# EAGLE board ai_breakout_ft2323RL_panel (EAGLE 6.5.0)
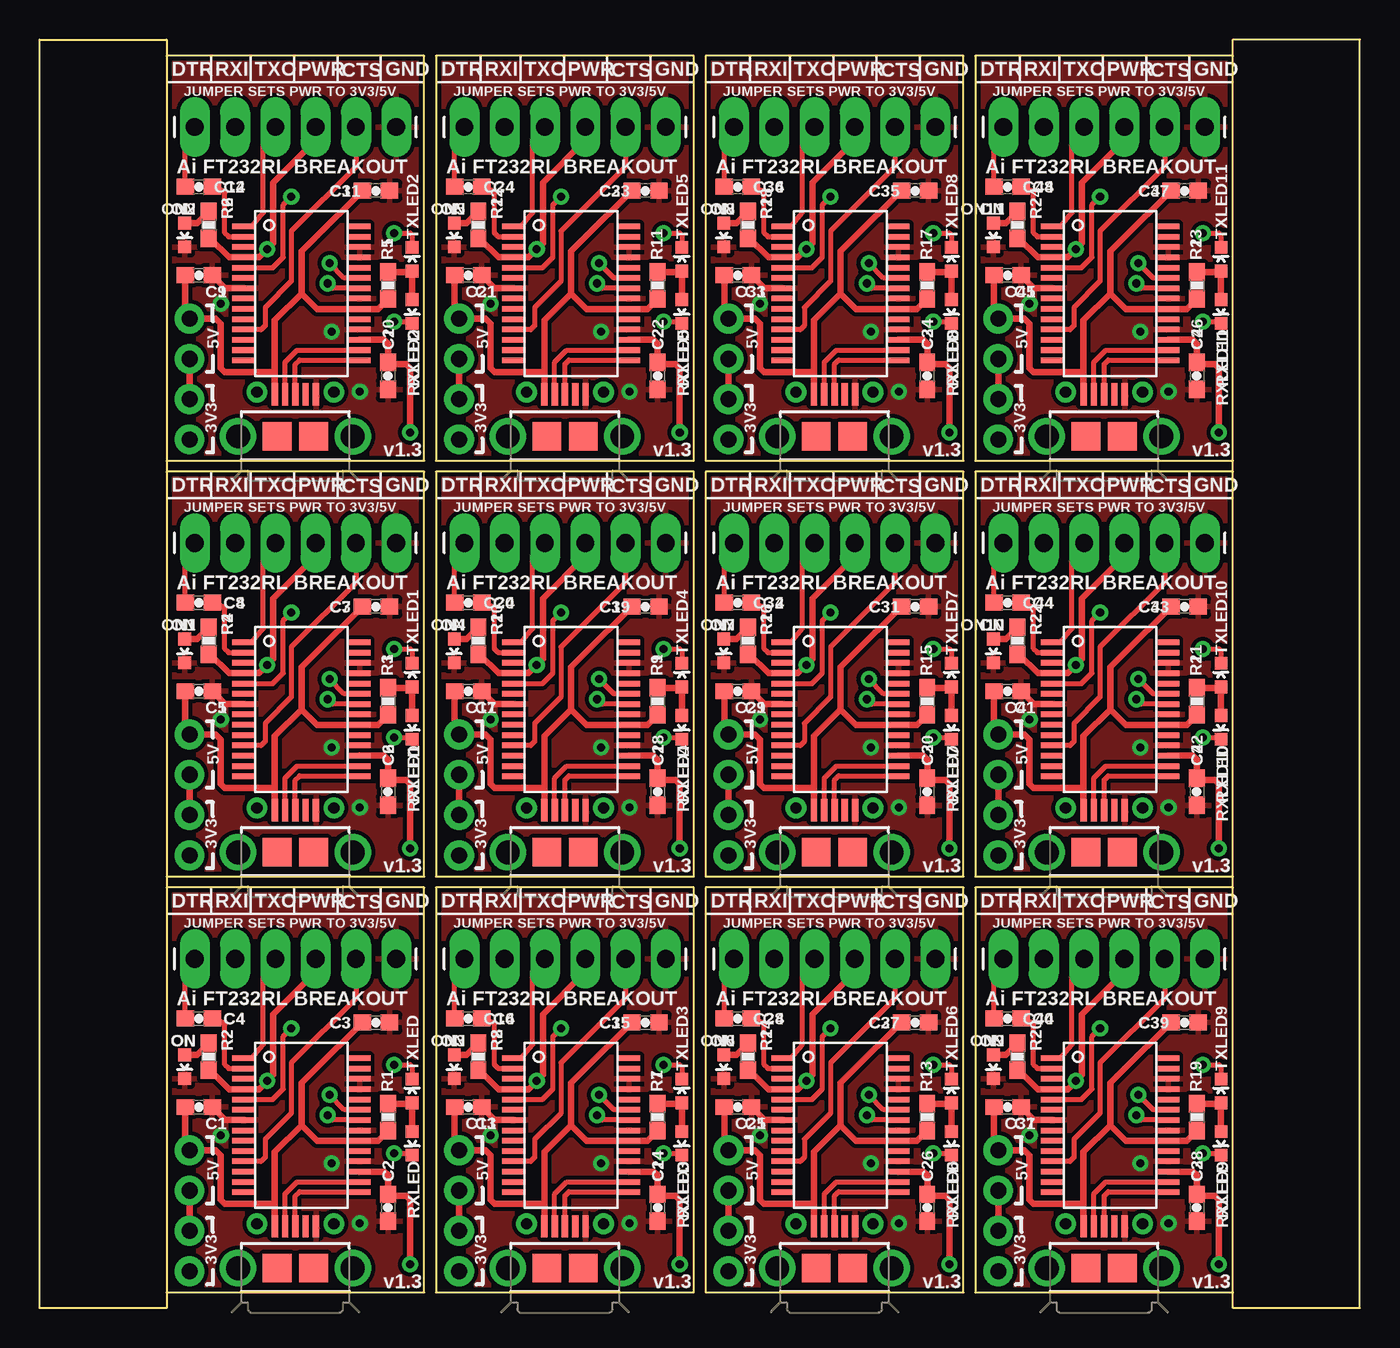
[diagram p0: board, top side]
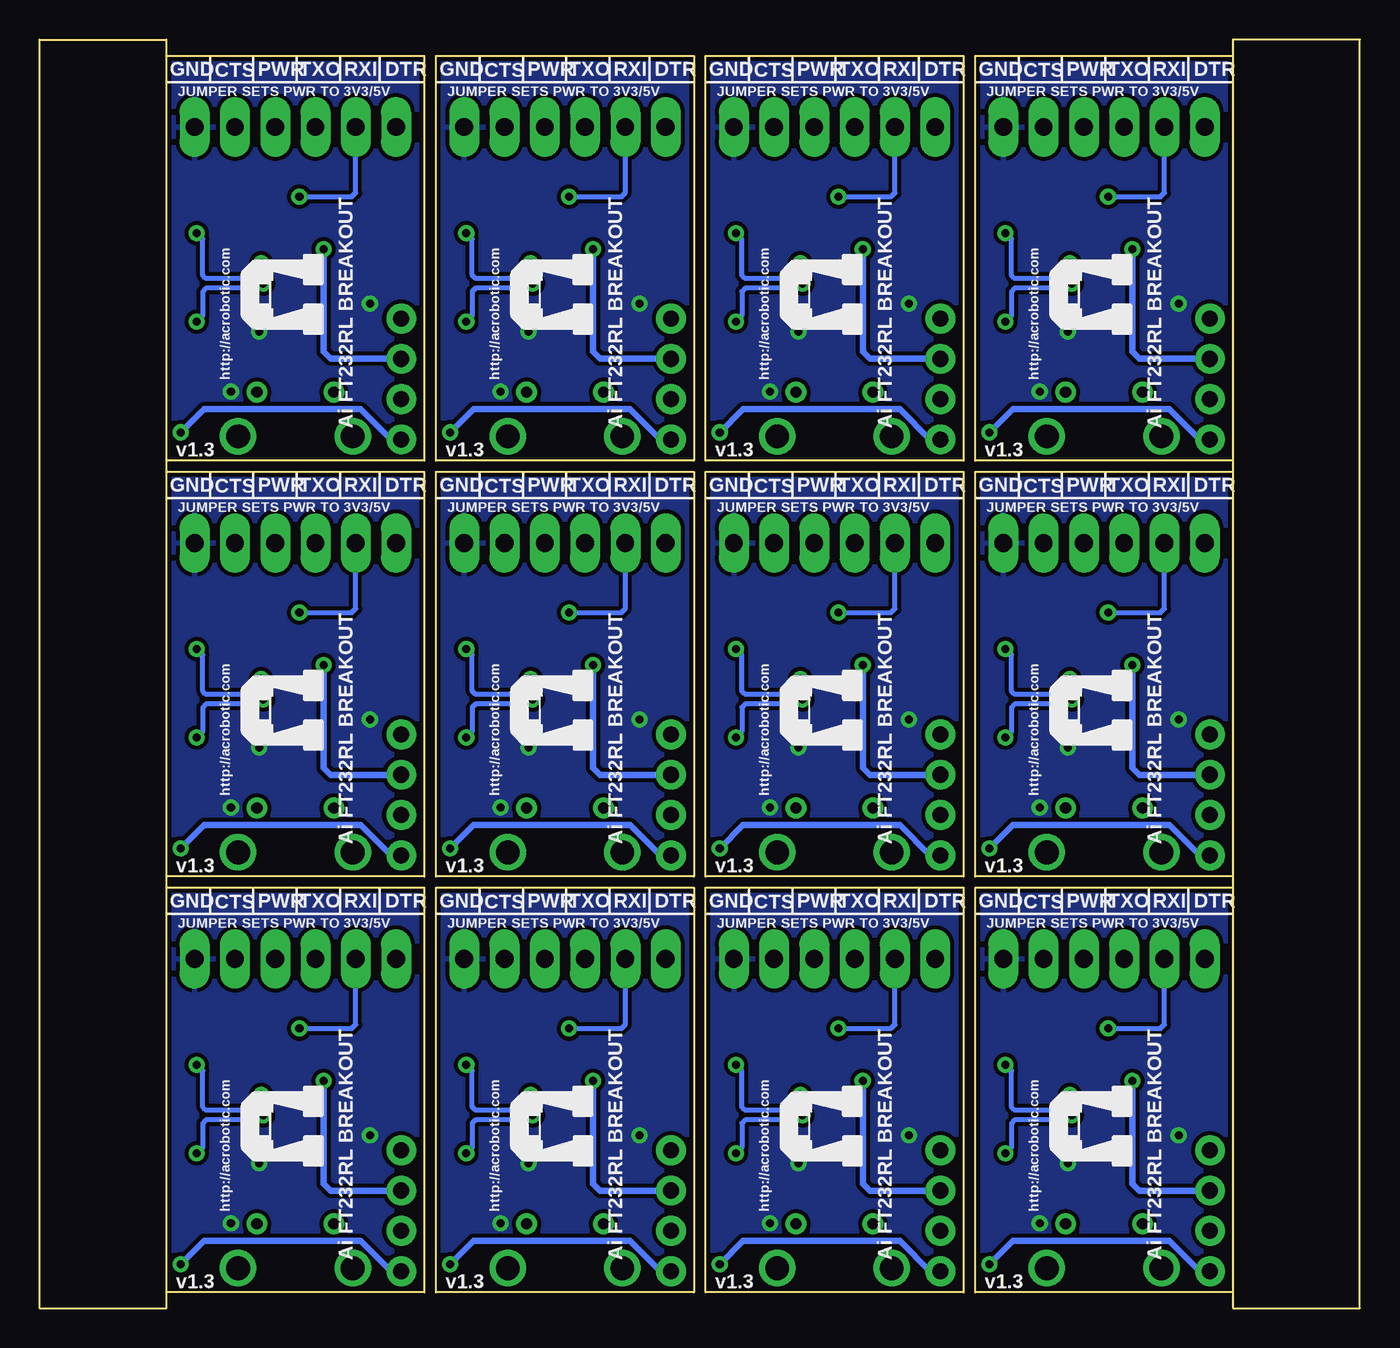
[diagram p1: board, bottom side, seen from below]

Size 83.26 x 80 mm. Coordinates in mm from the lower left corner, seen from the top.
Outline: 8,26.53 8,1 24.26,1 24.26,26.53 8,26.53
Outline: 0,0 0,80 8,80 8,0 0,0
Outline: 83.26,80 75.26,80 75.26,0 83.26,0 83.26,80
Outline: 8,52.75 8,27.23 24.26,27.23 24.26,52.75 8,52.75
Outline: 8,78.98 8,53.45 24.26,53.45 24.26,78.98 8,78.98
Outline: 25,26.53 25,1 41.26,1 41.26,26.53 25,26.53
Outline: 25,52.75 25,27.23 41.26,27.23 41.26,52.75 25,52.75
Outline: 25,78.98 25,53.45 41.26,53.45 41.26,78.98 25,78.98
Outline: 42,26.53 42,1 58.26,1 58.26,26.53 42,26.53
Outline: 42,52.75 42,27.23 58.26,27.23 58.26,52.75 42,52.75
Outline: 42,78.98 42,53.45 58.26,53.45 58.26,78.98 42,78.98
Outline: 59,26.53 59,1 75.26,1 75.26,26.53 59,26.53
Outline: 59,52.75 59,27.23 75.26,27.23 75.26,52.75 59,52.75
Outline: 59,78.98 59,53.45 75.26,53.45 75.26,78.98 59,78.98
Copper layers (1*16): Top 0.035mm / dielectric 1.5mm / Bottom 0.035mm
Design rules "ai_2layer": minimum track width 7mil, minimum drill 15mil, track to track 8mil, track to pad 8mil, pad to pad 8mil, via to via 8mil, smd to smd 8mil, copper to edge 8mil, drill to drill 8mil, minimum pad ring 12mil, minimum via ring 10mil, stop-mask expansion 4mil, vias tented up to drill 20mil, thermal gap 10mil
Net classes: 0 default: width 0.254 mm; 1 power: width 0.356 mm

## Footprints (pad centres in the part's own frame; a part is rotated, then mirrored left to right if it is on the bottom)
CAP-0603 = smd 1.1 x 1: 1 -0.85,0; 2 0.85,0
SSOP28-LD = smd 0.348 x 1.397: 1 -4.225,-3.656; 2 -3.575,-3.656; 3 -2.925,-3.656; 4 -2.275,-3.656; 5 -1.625,-3.656; 6 -0.975,-3.656; 7 -0.325,-3.656; 8 0.325,-3.656; 9 0.975,-3.656; 10 1.625,-3.656; 11 2.275,-3.656; 12 2.925,-3.656; 13 3.575,-3.656; 14 4.225,-3.656; 15 4.225,3.656; 16 3.575,3.656; 17 2.925,3.656; 18 2.275,3.656; 19 1.625,3.656; 20 0.975,3.656; 21 0.325,3.656; 22 -0.325,3.656; 23 -0.975,3.656; 24 -1.625,3.656; 25 -2.275,3.656; 26 -2.925,3.656; 27 -3.575,3.656; 28 -4.225,3.656
1X06-LONG = drill 1.118 pad 1.88 long: 1 -6.35,0; 2 -3.81,0; 3 -1.27,0; 4 1.27,0; 5 3.81,0; 6 6.35,0
1X04-NOSILK = drill 1.016 pad 1.88: 1 -3.81,0; 2 -1.27,0; 3 1.27,0; 4 3.81,0
LED-0603 = smd 0.8 x 0.8: A 0,-0.75; C 0,0.75
RES-0603 = smd 1.1 x 1: 1 -0.85,0; 2 0.85,0
USB-MICROB-TH = smd 0.4 x 1.4: D+ 0,2.65; D- -0.65,2.65; GND 1.3,2.65; ID 0.65,2.65; VBUS -1.3,2.65 | smd 1.8 x 1.8: M5 -1.15,0; M6 1.15,0 | drill 0.7: MT1 -2.425,2.8; MT2 2.425,2.8 | drill 1.5 pad 2.3: MT3 -3.61,0; MT4 3.61,0

## Placement (x,y rotation side)
C1  0.1uF  [CAP-0603]  10.03,12.68 0 top
C2  0.1uF  [CAP-0603]  21.97,6.33 270 top
C3  10uF  [CAP-0603]  21.21,18.02 0 top
C4  1uF  [CAP-0603]  10.03,18.27 180 top
C5  0.1uF  [CAP-0603]  10.03,38.91 0 top
C6  0.1uF  [CAP-0603]  21.97,32.56 270 top
C7  10uF  [CAP-0603]  21.21,44.24 0 top
C8  1uF  [CAP-0603]  10.03,44.5 180 top
C9  0.1uF  [CAP-0603]  10.03,65.14 0 top
C10  0.1uF  [CAP-0603]  21.97,58.79 270 top
C11  10uF  [CAP-0603]  21.21,70.47 0 top
C12  1uF  [CAP-0603]  10.03,70.73 180 top
C13  0.1uF  [CAP-0603]  27.03,12.68 0 top
C14  0.1uF  [CAP-0603]  38.97,6.33 270 top
C15  10uF  [CAP-0603]  38.21,18.02 0 top
C16  1uF  [CAP-0603]  27.03,18.27 180 top
C17  0.1uF  [CAP-0603]  27.03,38.91 0 top
C18  0.1uF  [CAP-0603]  38.97,32.56 270 top
C19  10uF  [CAP-0603]  38.21,44.24 0 top
C20  1uF  [CAP-0603]  27.03,44.5 180 top
C21  0.1uF  [CAP-0603]  27.03,65.14 0 top
C22  0.1uF  [CAP-0603]  38.97,58.79 270 top
C23  10uF  [CAP-0603]  38.21,70.47 0 top
C24  1uF  [CAP-0603]  27.03,70.73 180 top
C25  0.1uF  [CAP-0603]  44.03,12.68 0 top
C26  0.1uF  [CAP-0603]  55.97,6.33 270 top
C27  10uF  [CAP-0603]  55.21,18.02 0 top
C28  1uF  [CAP-0603]  44.03,18.27 180 top
C29  0.1uF  [CAP-0603]  44.03,38.91 0 top
C30  0.1uF  [CAP-0603]  55.97,32.56 270 top
C31  10uF  [CAP-0603]  55.21,44.24 0 top
C32  1uF  [CAP-0603]  44.03,44.5 180 top
C33  0.1uF  [CAP-0603]  44.03,65.14 0 top
C34  0.1uF  [CAP-0603]  55.97,58.79 270 top
C35  10uF  [CAP-0603]  55.21,70.47 0 top
C36  1uF  [CAP-0603]  44.03,70.73 180 top
C37  0.1uF  [CAP-0603]  61.03,12.68 0 top
C38  0.1uF  [CAP-0603]  72.97,6.33 270 top
C39  10uF  [CAP-0603]  72.21,18.02 0 top
C40  1uF  [CAP-0603]  61.03,18.27 180 top
C41  0.1uF  [CAP-0603]  61.03,38.91 0 top
C42  0.1uF  [CAP-0603]  72.97,32.56 270 top
C43  10uF  [CAP-0603]  72.21,44.24 0 top
C44  1uF  [CAP-0603]  61.03,44.5 180 top
C45  0.1uF  [CAP-0603]  61.03,65.14 0 top
C46  0.1uF  [CAP-0603]  72.97,58.79 270 top
C47  10uF  [CAP-0603]  72.21,70.47 0 top
C48  1uF  [CAP-0603]  61.03,70.73 180 top
IC1  FT2332RL  [SSOP28-LD]  16.51,11.54 270 top
IC2  FT2332RL  [SSOP28-LD]  16.51,37.77 270 top
IC3  FT2332RL  [SSOP28-LD]  16.51,63.99 270 top
IC4  FT2332RL  [SSOP28-LD]  33.51,11.54 270 top
IC5  FT2332RL  [SSOP28-LD]  33.51,37.77 270 top
IC6  FT2332RL  [SSOP28-LD]  33.51,63.99 270 top
IC7  FT2332RL  [SSOP28-LD]  50.51,11.54 270 top
IC8  FT2332RL  [SSOP28-LD]  50.51,37.77 270 top
IC9  FT2332RL  [SSOP28-LD]  50.51,63.99 270 top
IC10  FT2332RL  [SSOP28-LD]  67.51,11.54 270 top
IC11  FT2332RL  [SSOP28-LD]  67.51,37.77 270 top
IC12  FT2332RL  [SSOP28-LD]  67.51,63.99 270 top
J1  1X06LONG  [1X06-LONG]  16.13,22.03 180 top
J2  1X06LONG  [1X06-LONG]  16.13,48.26 180 top
J3  1X06LONG  [1X06-LONG]  16.13,74.49 180 top
J4  1X06LONG  [1X06-LONG]  33.13,22.03 180 top
J5  1X06LONG  [1X06-LONG]  33.13,48.26 180 top
J6  1X06LONG  [1X06-LONG]  33.13,74.49 180 top
J7  1X06LONG  [1X06-LONG]  50.13,22.03 180 top
J8  1X06LONG  [1X06-LONG]  50.13,48.26 180 top
J9  1X06LONG  [1X06-LONG]  50.13,74.49 180 top
J10  1X06LONG  [1X06-LONG]  67.13,22.03 180 top
J11  1X06LONG  [1X06-LONG]  67.13,48.26 180 top
J12  1X06LONG  [1X06-LONG]  67.13,74.49 180 top
JP1  1X04NOSILK  [1X04-NOSILK]  9.45,6.15 270 top
JP2  1X04NOSILK  [1X04-NOSILK]  9.45,32.37 270 top
JP3  1X04NOSILK  [1X04-NOSILK]  9.45,58.6 270 top
JP4  1X04NOSILK  [1X04-NOSILK]  26.45,6.15 270 top
JP5  1X04NOSILK  [1X04-NOSILK]  26.45,32.37 270 top
JP6  1X04NOSILK  [1X04-NOSILK]  26.45,58.6 270 top
JP7  1X04NOSILK  [1X04-NOSILK]  43.45,6.15 270 top
JP8  1X04NOSILK  [1X04-NOSILK]  43.45,32.37 270 top
JP9  1X04NOSILK  [1X04-NOSILK]  43.45,58.6 270 top
JP10  1X04NOSILK  [1X04-NOSILK]  60.45,6.15 270 top
JP11  1X04NOSILK  [1X04-NOSILK]  60.45,32.37 270 top
JP12  1X04NOSILK  [1X04-NOSILK]  60.45,58.6 270 top
ON  BLUE  [LED-0603]  9.14,15.22 180 top
ON1  BLUE  [LED-0603]  9.14,41.45 180 top
ON2  BLUE  [LED-0603]  9.14,67.68 180 top
ON3  BLUE  [LED-0603]  26.14,15.22 180 top
ON4  BLUE  [LED-0603]  26.14,41.45 180 top
ON5  BLUE  [LED-0603]  26.14,67.68 180 top
ON6  BLUE  [LED-0603]  43.14,15.22 180 top
ON7  BLUE  [LED-0603]  43.14,41.45 180 top
ON8  BLUE  [LED-0603]  43.14,67.68 180 top
ON9  BLUE  [LED-0603]  60.14,15.22 180 top
ON10  BLUE  [LED-0603]  60.14,41.45 180 top
ON11  BLUE  [LED-0603]  60.14,67.68 180 top
R1  300  [RES-0603]  21.97,12.05 270 top
R2  1K  [RES-0603]  10.67,15.86 90 top
R3  300  [RES-0603]  21.97,38.28 270 top
R4  1K  [RES-0603]  10.67,42.09 90 top
R5  300  [RES-0603]  21.97,64.5 270 top
R6  1K  [RES-0603]  10.67,68.31 90 top
R7  300  [RES-0603]  38.97,12.05 270 top
R8  1K  [RES-0603]  27.67,15.86 90 top
R9  300  [RES-0603]  38.97,38.28 270 top
R10  1K  [RES-0603]  27.67,42.09 90 top
R11  300  [RES-0603]  38.97,64.5 270 top
R12  1K  [RES-0603]  27.67,68.31 90 top
R13  300  [RES-0603]  55.97,12.05 270 top
R14  1K  [RES-0603]  44.67,15.86 90 top
R15  300  [RES-0603]  55.97,38.28 270 top
R16  1K  [RES-0603]  44.67,42.09 90 top
R17  300  [RES-0603]  55.97,64.5 270 top
R18  1K  [RES-0603]  44.67,68.31 90 top
R19  300  [RES-0603]  72.97,12.05 270 top
R20  1K  [RES-0603]  61.67,15.86 90 top
R21  300  [RES-0603]  72.97,38.28 270 top
R22  1K  [RES-0603]  61.67,42.09 90 top
R23  300  [RES-0603]  72.97,64.5 270 top
R24  1K  [RES-0603]  61.67,68.31 90 top
RXLED  YELLOW  [LED-0603]  23.49,10.4 180 top
RXLED1  YELLOW  [LED-0603]  23.49,36.62 180 top
RXLED2  YELLOW  [LED-0603]  23.49,62.85 180 top
RXLED3  YELLOW  [LED-0603]  40.49,10.4 180 top
RXLED4  YELLOW  [LED-0603]  40.49,36.62 180 top
RXLED5  YELLOW  [LED-0603]  40.49,62.85 180 top
RXLED6  YELLOW  [LED-0603]  57.49,10.4 180 top
RXLED7  YELLOW  [LED-0603]  57.49,36.62 180 top
RXLED8  YELLOW  [LED-0603]  57.49,62.85 180 top
RXLED9  YELLOW  [LED-0603]  74.49,10.4 180 top
RXLED10  YELLOW  [LED-0603]  74.49,36.62 180 top
RXLED11  YELLOW  [LED-0603]  74.49,62.85 180 top
TXLED  YELLOW  [LED-0603]  23.49,13.7 0 top
TXLED1  YELLOW  [LED-0603]  23.49,39.93 0 top
TXLED2  YELLOW  [LED-0603]  23.49,66.15 0 top
TXLED3  YELLOW  [LED-0603]  40.49,13.7 0 top
TXLED4  YELLOW  [LED-0603]  40.49,39.93 0 top
TXLED5  YELLOW  [LED-0603]  40.49,66.15 0 top
TXLED6  YELLOW  [LED-0603]  57.49,13.7 0 top
TXLED7  YELLOW  [LED-0603]  57.49,39.93 0 top
TXLED8  YELLOW  [LED-0603]  57.49,66.15 0 top
TXLED9  YELLOW  [LED-0603]  74.49,13.7 0 top
TXLED10  YELLOW  [LED-0603]  74.49,39.93 0 top
TXLED11  YELLOW  [LED-0603]  74.49,66.15 0 top
U$1  AI-LOGOL  [AI-LOGO-L]  16.51,37.77 90 bottom
U$2  AI-LOGOL  [AI-LOGO-L]  16.51,63.99 90 bottom
U$3  AI-LOGOL  [AI-LOGO-L]  16.51,11.54 90 bottom
U$4  AI-LOGOL  [AI-LOGO-L]  33.51,11.54 90 bottom
U$5  AI-LOGOL  [AI-LOGO-L]  33.51,37.77 90 bottom
U$6  AI-LOGOL  [AI-LOGO-L]  33.51,63.99 90 bottom
U$7  AI-LOGOL  [AI-LOGO-L]  50.51,11.54 90 bottom
U$8  AI-LOGOL  [AI-LOGO-L]  50.51,37.77 90 bottom
U$9  AI-LOGOL  [AI-LOGO-L]  50.51,63.99 90 bottom
U$10  AI-LOGOL  [AI-LOGO-L]  67.51,11.54 90 bottom
U$11  AI-LOGOL  [AI-LOGO-L]  67.51,37.77 90 bottom
U$12  AI-LOGOL  [AI-LOGO-L]  67.51,63.99 90 bottom
USB1  USBMICROB-TH  [USB-MICROB-TH]  16.13,2.52 0 top
USB2  USBMICROB-TH  [USB-MICROB-TH]  16.13,28.75 0 top
USB3  USBMICROB-TH  [USB-MICROB-TH]  16.13,54.98 0 top
USB4  USBMICROB-TH  [USB-MICROB-TH]  33.13,2.52 0 top
USB5  USBMICROB-TH  [USB-MICROB-TH]  33.13,28.75 0 top
USB6  USBMICROB-TH  [USB-MICROB-TH]  33.13,54.98 0 top
USB7  USBMICROB-TH  [USB-MICROB-TH]  50.13,2.52 0 top
USB8  USBMICROB-TH  [USB-MICROB-TH]  50.13,28.75 0 top
USB9  USBMICROB-TH  [USB-MICROB-TH]  50.13,54.98 0 top
USB10  USBMICROB-TH  [USB-MICROB-TH]  67.13,2.52 0 top
USB11  USBMICROB-TH  [USB-MICROB-TH]  67.13,28.75 0 top
USB12  USBMICROB-TH  [USB-MICROB-TH]  67.13,54.98 0 top

## Library data of the parts
C1-C48 R1-R24 = Ai_Passives
IC1-IC12 = Ai_IC
J1-J12 JP1-JP12 USB1-USB12 = Ai_Connectors
ON ON1-ON11 RXLED RXLED1-RXLED11 TXLED TXLED1-TXLED11 = Ai_LED
U$1-U$12 = Ai_Miscellany

## Nets
3V1 [power]: C6.1 IC2.17 JP2.4
3V2 [power]: C10.1 IC3.17 JP3.4
3V3 [power]: C2.1 IC1.17 JP1.4
3V4 [power]: C14.1 IC4.17 JP4.4
3V5 [power]: C18.1 IC5.17 JP5.4
3V6 [power]: C22.1 IC6.17 JP6.4
3V7 [power]: C26.1 IC7.17 JP7.4
3V8 [power]: C30.1 IC8.17 JP8.4
3V9 [power]: C34.1 IC9.17 JP9.4
3V10 [power]: C38.1 IC10.17 JP10.4
3V11 [power]: C42.1 IC11.17 JP11.4
3V12 [power]: C46.1 IC12.17 JP12.4
5V [power]: C1.1 C3.1 IC1.20 JP1.1 R1.2 USB1.VBUS
5V1 [power]: C5.1 C7.1 IC2.20 JP2.1 R3.2 USB2.VBUS
5V2 [power]: C9.1 C11.1 IC3.20 JP3.1 R5.2 USB3.VBUS
5V3 [power]: C13.1 C15.1 IC4.20 JP4.1 R7.2 USB4.VBUS
5V4 [power]: C17.1 C19.1 IC5.20 JP5.1 R9.2 USB5.VBUS
5V5 [power]: C21.1 C23.1 IC6.20 JP6.1 R11.2 USB6.VBUS
5V6 [power]: C25.1 C27.1 IC7.20 JP7.1 R13.2 USB7.VBUS
5V7 [power]: C29.1 C31.1 IC8.20 JP8.1 R15.2 USB8.VBUS
5V8 [power]: C33.1 C35.1 IC9.20 JP9.1 R17.2 USB9.VBUS
5V9 [power]: C37.1 C39.1 IC10.20 JP10.1 R19.2 USB10.VBUS
5V10 [power]: C41.1 C43.1 IC11.20 JP11.1 R21.2 USB11.VBUS
5V11 [power]: C45.1 C47.1 IC12.20 JP12.1 R23.2 USB12.VBUS
CTS: IC1.11 J1.2
CTS1: IC2.11 J2.2
CTS2: IC3.11 J3.2
CTS3: IC4.11 J4.2
CTS4: IC5.11 J5.2
CTS5: IC6.11 J6.2
CTS6: IC7.11 J7.2
CTS7: IC8.11 J8.2
CTS8: IC9.11 J9.2
CTS9: IC10.11 J10.2
CTS10: IC11.11 J11.2
CTS11: IC12.11 J12.2
DTR: C4.1 IC1.2
DTR1: C8.1 IC2.2
DTR2: C12.1 IC3.2
DTR3: C16.1 IC4.2
DTR4: C20.1 IC5.2
DTR5: C24.1 IC6.2
DTR6: C28.1 IC7.2
DTR7: C32.1 IC8.2
DTR8: C36.1 IC9.2
DTR9: C40.1 IC10.2
DTR10: C44.1 IC11.2
DTR11: C48.1 IC12.2
GND [power]: C1.2 C2.2 C3.2 IC1.7 IC1.18 IC1.21 IC1.25 IC1.26 J1.1 ON.C USB1.GND
GND1 [power]: C5.2 C6.2 C7.2 IC2.7 IC2.18 IC2.21 IC2.25 IC2.26 J2.1 ON1.C USB2.GND
GND2 [power]: C9.2 C10.2 C11.2 IC3.7 IC3.18 IC3.21 IC3.25 IC3.26 J3.1 ON2.C USB3.GND
GND3 [power]: C13.2 C14.2 C15.2 IC4.7 IC4.18 IC4.21 IC4.25 IC4.26 J4.1 ON3.C USB4.GND
GND4 [power]: C17.2 C18.2 C19.2 IC5.7 IC5.18 IC5.21 IC5.25 IC5.26 J5.1 ON4.C USB5.GND
GND5 [power]: C21.2 C22.2 C23.2 IC6.7 IC6.18 IC6.21 IC6.25 IC6.26 J6.1 ON5.C USB6.GND
GND6 [power]: C25.2 C26.2 C27.2 IC7.7 IC7.18 IC7.21 IC7.25 IC7.26 J7.1 ON6.C USB7.GND
GND7 [power]: C29.2 C30.2 C31.2 IC8.7 IC8.18 IC8.21 IC8.25 IC8.26 J8.1 ON7.C USB8.GND
GND8 [power]: C33.2 C34.2 C35.2 IC9.7 IC9.18 IC9.21 IC9.25 IC9.26 J9.1 ON8.C USB9.GND
GND9 [power]: C37.2 C38.2 C39.2 IC10.7 IC10.18 IC10.21 IC10.25 IC10.26 J10.1 ON9.C USB10.GND
GND10 [power]: C41.2 C42.2 C43.2 IC11.7 IC11.18 IC11.21 IC11.25 IC11.26 J11.1 ON10.C USB11.GND
GND11 [power]: C45.2 C46.2 C47.2 IC12.7 IC12.18 IC12.21 IC12.25 IC12.26 J12.1 ON11.C USB12.GND
N$1: IC1.23 TXLED.C
N$2: IC1.22 RXLED.C
N$3: IC1.16 USB1.D-
N$4: IC1.15 USB1.D+
N$5: ON.A R2.2
N$6: R1.1 RXLED.A TXLED.A
N$7: C4.2 J1.6
N$8: IC2.16 USB2.D-
N$9: IC2.15 USB2.D+
N$10: R3.1 RXLED1.A TXLED1.A
N$11: ON1.A R4.2
N$12: IC2.23 TXLED1.C
N$13: IC2.22 RXLED1.C
N$14: C8.2 J2.6
N$15: IC3.16 USB3.D-
N$16: IC3.15 USB3.D+
N$17: R5.1 RXLED2.A TXLED2.A
N$18: ON2.A R6.2
N$19: IC3.23 TXLED2.C
N$20: IC3.22 RXLED2.C
N$21: C12.2 J3.6
N$22: IC4.16 USB4.D-
N$23: IC4.15 USB4.D+
N$24: R7.1 RXLED3.A TXLED3.A
N$25: ON3.A R8.2
N$26: IC4.23 TXLED3.C
N$27: IC4.22 RXLED3.C
N$28: C16.2 J4.6
N$29: IC5.16 USB5.D-
N$30: IC5.15 USB5.D+
N$31: R9.1 RXLED4.A TXLED4.A
N$32: ON4.A R10.2
N$33: IC5.23 TXLED4.C
N$34: IC5.22 RXLED4.C
N$35: C20.2 J5.6
N$36: IC6.16 USB6.D-
N$37: IC6.15 USB6.D+
N$38: R11.1 RXLED5.A TXLED5.A
N$39: ON5.A R12.2
N$40: IC6.23 TXLED5.C
N$41: IC6.22 RXLED5.C
N$42: C24.2 J6.6
N$43: IC7.16 USB7.D-
N$44: IC7.15 USB7.D+
N$45: R13.1 RXLED6.A TXLED6.A
N$46: ON6.A R14.2
N$47: IC7.23 TXLED6.C
N$48: IC7.22 RXLED6.C
N$49: C28.2 J7.6
N$50: IC8.16 USB8.D-
N$51: IC8.15 USB8.D+
N$52: R15.1 RXLED7.A TXLED7.A
N$53: ON7.A R16.2
N$54: IC8.23 TXLED7.C
N$55: IC8.22 RXLED7.C
N$56: C32.2 J8.6
N$57: IC9.16 USB9.D-
N$58: IC9.15 USB9.D+
N$59: R17.1 RXLED8.A TXLED8.A
N$60: ON8.A R18.2
N$61: IC9.23 TXLED8.C
N$62: IC9.22 RXLED8.C
N$63: C36.2 J9.6
N$64: IC10.16 USB10.D-
N$65: IC10.15 USB10.D+
N$66: R19.1 RXLED9.A TXLED9.A
N$67: ON9.A R20.2
N$68: IC10.23 TXLED9.C
N$69: IC10.22 RXLED9.C
N$70: C40.2 J10.6
N$71: IC11.16 USB11.D-
N$72: IC11.15 USB11.D+
N$73: R21.1 RXLED10.A TXLED10.A
N$74: ON10.A R22.2
N$75: IC11.23 TXLED10.C
N$76: IC11.22 RXLED10.C
N$77: C44.2 J11.6
N$78: IC12.16 USB12.D-
N$79: IC12.15 USB12.D+
N$80: R23.1 RXLED11.A TXLED11.A
N$81: ON11.A R24.2
N$82: IC12.23 TXLED11.C
N$83: IC12.22 RXLED11.C
N$84: C48.2 J12.6
PWR [power]: IC1.4 J1.3 JP1.2 JP1.3 R2.1
PWR1 [power]: IC2.4 J2.3 JP2.2 JP2.3 R4.1
PWR2 [power]: IC3.4 J3.3 JP3.2 JP3.3 R6.1
PWR3 [power]: IC4.4 J4.3 JP4.2 JP4.3 R8.1
PWR4 [power]: IC5.4 J5.3 JP5.2 JP5.3 R10.1
PWR5 [power]: IC6.4 J6.3 JP6.2 JP6.3 R12.1
PWR6 [power]: IC7.4 J7.3 JP7.2 JP7.3 R14.1
PWR7 [power]: IC8.4 J8.3 JP8.2 JP8.3 R16.1
PWR8 [power]: IC9.4 J9.3 JP9.2 JP9.3 R18.1
PWR9 [power]: IC10.4 J10.3 JP10.2 JP10.3 R20.1
PWR10 [power]: IC11.4 J11.3 JP11.2 JP11.3 R22.1
PWR11 [power]: IC12.4 J12.3 JP12.2 JP12.3 R24.1
RXI: IC1.5 J1.5
RXI1: IC2.5 J2.5
RXI2: IC3.5 J3.5
RXI3: IC4.5 J4.5
RXI4: IC5.5 J5.5
RXI5: IC6.5 J6.5
RXI6: IC7.5 J7.5
RXI7: IC8.5 J8.5
RXI8: IC9.5 J9.5
RXI9: IC10.5 J10.5
RXI10: IC11.5 J11.5
RXI11: IC12.5 J12.5
TXO: IC1.1 J1.4
TXO1: IC2.1 J2.4
TXO2: IC3.1 J3.4
TXO3: IC4.1 J4.4
TXO4: IC5.1 J5.4
TXO5: IC6.1 J6.4
TXO6: IC7.1 J7.4
TXO7: IC8.1 J8.4
TXO8: IC9.1 J9.4
TXO9: IC10.1 J10.4
TXO10: IC11.1 J11.4
TXO11: IC12.1 J12.4

## Tracks (layer width: path | path; a pad name or v marks a point on that pad's centre or on a via)
3V1  (via drill 0.51)
  Top 0.406: v23.37,29 23.37,33.07 23.11,33.32 22.06,33.32 C6.1 21.97,34.59 21.72,34.84 IC2.17
  Bottom 0.406: JP2.4 10.1,28.56 12.01,30.48 21.89,30.48 v23.37,29
3V2  (via drill 0.51)
  Top 0.406: v23.37,55.23 23.37,59.3 23.11,59.55 22.06,59.55 C10.1 21.97,60.82 21.72,61.07 IC3.17
  Bottom 0.406: JP3.4 10.1,54.79 12.01,56.7 21.89,56.7 v23.37,55.23
3V3  (via drill 0.51)
  Top 0.406: v23.37,2.78 23.37,6.84 23.11,7.1 22.06,7.1 C2.1 21.97,8.37 21.72,8.62 IC1.17
  Bottom 0.406: JP1.4 10.1,2.34 12.01,4.25 21.89,4.25 v23.37,2.78
3V4  (via drill 0.51)
  Top 0.406: v40.37,2.78 40.37,6.84 40.11,7.1 39.06,7.1 C14.1 38.97,8.37 38.72,8.62 IC4.17
  Bottom 0.406: JP4.4 27.1,2.34 29.01,4.25 38.89,4.25 v40.37,2.78
3V5  (via drill 0.51)
  Top 0.406: v40.37,29 40.37,33.07 40.11,33.32 39.06,33.32 C18.1 38.97,34.59 38.72,34.84 IC5.17
  Bottom 0.406: JP5.4 27.1,28.56 29.01,30.48 38.89,30.48 v40.37,29
3V6  (via drill 0.51)
  Top 0.406: v40.37,55.23 40.37,59.3 40.11,59.55 39.06,59.55 C22.1 38.97,60.82 38.72,61.07 IC6.17
  Bottom 0.406: JP6.4 27.1,54.79 29.01,56.7 38.89,56.7 v40.37,55.23
3V7  (via drill 0.51)
  Top 0.406: v57.37,2.78 57.37,6.84 57.11,7.1 56.06,7.1 C26.1 55.97,8.37 55.72,8.62 IC7.17
  Bottom 0.406: JP7.4 44.1,2.34 46.01,4.25 55.89,4.25 v57.37,2.78
3V8  (via drill 0.51)
  Top 0.406: v57.37,29 57.37,33.07 57.11,33.32 56.06,33.32 C30.1 55.97,34.59 55.72,34.84 IC8.17
  Bottom 0.406: JP8.4 44.1,28.56 46.01,30.48 55.89,30.48 v57.37,29
3V9  (via drill 0.51)
  Top 0.406: v57.37,55.23 57.37,59.3 57.11,59.55 56.06,59.55 C34.1 55.97,60.82 55.72,61.07 IC9.17
  Bottom 0.406: JP9.4 44.1,54.79 46.01,56.7 55.89,56.7 v57.37,55.23
3V10  (via drill 0.51)
  Top 0.406: v74.37,2.78 74.37,6.84 74.11,7.1 73.06,7.1 C38.1 72.97,8.37 72.72,8.62 IC10.17
  Bottom 0.406: JP10.4 61.1,2.34 63.01,4.25 72.89,4.25 v74.37,2.78
3V11  (via drill 0.51)
  Top 0.406: v74.37,29 74.37,33.07 74.11,33.32 73.06,33.32 C42.1 72.97,34.59 72.72,34.84 IC11.17
  Bottom 0.406: JP11.4 61.1,28.56 63.01,30.48 72.89,30.48 v74.37,29
3V12  (via drill 0.51)
  Top 0.406: v74.37,55.23 74.37,59.3 74.11,59.55 73.06,59.55 C46.1 72.97,60.82 72.72,61.07 IC12.17
  Bottom 0.406: JP12.4 61.1,54.79 63.01,56.7 72.89,56.7 v74.37,55.23
5V
  Top 0.406: USB1.VBUS 14.83,6.33 | 14.83,6.33 14.83,9.86 16.51,11.54 | 14.83,6.33 14.57,6.59 11.68,6.59 11.43,6.84 11.43,9.64 11.11,9.96 JP1.1 9.18,10.22 C1.1 | R1.2 21.34,10.57 IC1.20 17.48,10.57 16.51,11.54 | C3.1 17.23,14.93 16.51,14.21 16.51,11.54
5V1
  Top 0.406: USB2.VBUS 14.83,32.56 | 14.83,32.56 14.83,36.09 16.51,37.77 | 14.83,32.56 14.57,32.81 11.68,32.81 11.43,33.07 11.43,35.86 11.11,36.18 JP2.1 9.18,36.45 C5.1 | R3.2 21.34,36.79 IC2.20 17.48,36.79 16.51,37.77 | C7.1 17.23,41.16 16.51,40.44 16.51,37.77
5V2
  Top 0.406: USB3.VBUS 14.83,58.79 | 14.83,58.79 14.83,62.31 16.51,63.99 | 14.83,58.79 14.57,59.04 11.68,59.04 11.43,59.3 11.43,62.09 11.11,62.41 JP3.1 9.18,62.68 C9.1 | R5.2 21.34,63.02 IC3.20 17.48,63.02 16.51,63.99 | C11.1 17.23,67.39 16.51,66.66 16.51,63.99
5V3
  Top 0.406: USB4.VBUS 31.83,6.33 | 31.83,6.33 31.83,9.86 33.51,11.54 | 31.83,6.33 31.57,6.59 28.68,6.59 28.43,6.84 28.43,9.64 28.11,9.96 JP4.1 26.18,10.22 C13.1 | R7.2 38.34,10.57 IC4.20 34.48,10.57 33.51,11.54 | C15.1 34.23,14.93 33.51,14.21 33.51,11.54
5V4
  Top 0.406: USB5.VBUS 31.83,32.56 | 31.83,32.56 31.83,36.09 33.51,37.77 | 31.83,32.56 31.57,32.81 28.68,32.81 28.43,33.07 28.43,35.86 28.11,36.18 JP5.1 26.18,36.45 C17.1 | R9.2 38.34,36.79 IC5.20 34.48,36.79 33.51,37.77 | C19.1 34.23,41.16 33.51,40.44 33.51,37.77
5V5
  Top 0.406: USB6.VBUS 31.83,58.79 | 31.83,58.79 31.83,62.31 33.51,63.99 | 31.83,58.79 31.57,59.04 28.68,59.04 28.43,59.3 28.43,62.09 28.11,62.41 JP6.1 26.18,62.68 C21.1 | R11.2 38.34,63.02 IC6.20 34.48,63.02 33.51,63.99 | C23.1 34.23,67.39 33.51,66.66 33.51,63.99
5V6
  Top 0.406: USB7.VBUS 48.83,6.33 | 48.83,6.33 48.83,9.86 50.51,11.54 | 48.83,6.33 48.57,6.59 45.68,6.59 45.43,6.84 45.43,9.64 45.11,9.96 JP7.1 43.18,10.22 C25.1 | R13.2 55.34,10.57 IC7.20 51.48,10.57 50.51,11.54 | C27.1 51.23,14.93 50.51,14.21 50.51,11.54
5V7
  Top 0.406: USB8.VBUS 48.83,32.56 | 48.83,32.56 48.83,36.09 50.51,37.77 | 48.83,32.56 48.57,32.81 45.68,32.81 45.43,33.07 45.43,35.86 45.11,36.18 JP8.1 43.18,36.45 C29.1 | R15.2 55.34,36.79 IC8.20 51.48,36.79 50.51,37.77 | C31.1 51.23,41.16 50.51,40.44 50.51,37.77
5V8
  Top 0.406: USB9.VBUS 48.83,58.79 | 48.83,58.79 48.83,62.31 50.51,63.99 | 48.83,58.79 48.57,59.04 45.68,59.04 45.43,59.3 45.43,62.09 45.11,62.41 JP9.1 43.18,62.68 C33.1 | R17.2 55.34,63.02 IC9.20 51.48,63.02 50.51,63.99 | C35.1 51.23,67.39 50.51,66.66 50.51,63.99
5V9
  Top 0.406: USB10.VBUS 65.83,6.33 | 65.83,6.33 65.83,9.86 67.51,11.54 | 65.83,6.33 65.57,6.59 62.68,6.59 62.43,6.84 62.43,9.64 62.11,9.96 JP10.1 60.18,10.22 C37.1 | R19.2 72.34,10.57 IC10.20 68.48,10.57 67.51,11.54 | C39.1 68.23,14.93 67.51,14.21 67.51,11.54
5V10
  Top 0.406: USB11.VBUS 65.83,32.56 | 65.83,32.56 65.83,36.09 67.51,37.77 | 65.83,32.56 65.57,32.81 62.68,32.81 62.43,33.07 62.43,35.86 62.11,36.18 JP11.1 60.18,36.45 C41.1 | R21.2 72.34,36.79 IC11.20 68.48,36.79 67.51,37.77 | C43.1 68.23,41.16 67.51,40.44 67.51,37.77
5V11
  Top 0.406: USB12.VBUS 65.83,58.79 | 65.83,58.79 65.83,62.31 67.51,63.99 | 65.83,58.79 65.57,59.04 62.68,59.04 62.43,59.3 62.43,62.09 62.11,62.41 JP12.1 60.18,62.68 C45.1 | R23.2 72.34,63.02 IC12.20 68.48,63.02 67.51,63.99 | C47.1 68.23,67.39 67.51,66.66 67.51,63.99
CTS
  Top 0.305: J1.2 19.94,19.55 15.87,15.48 15.87,12.3 14.22,10.65 14.22,9.51 13.97,9.26 12.86,9.26 IC1.11
CTS1
  Top 0.305: J2.2 19.94,45.77 15.87,41.7 15.87,38.53 14.22,36.88 14.22,35.74 13.97,35.48 12.86,35.48 IC2.11
CTS2
  Top 0.305: J3.2 19.94,72 15.87,67.93 15.87,64.76 14.22,63.11 14.22,61.96 13.97,61.71 12.86,61.71 IC3.11
CTS3
  Top 0.305: J4.2 36.94,19.55 32.87,15.48 32.87,12.3 31.22,10.65 31.22,9.51 30.97,9.26 29.86,9.26 IC4.11
CTS4
  Top 0.305: J5.2 36.94,45.77 32.87,41.7 32.87,38.53 31.22,36.88 31.22,35.74 30.97,35.48 29.86,35.48 IC5.11
CTS5
  Top 0.305: J6.2 36.94,72 32.87,67.93 32.87,64.76 31.22,63.11 31.22,61.96 30.97,61.71 29.86,61.71 IC6.11
CTS6
  Top 0.305: J7.2 53.94,19.55 49.87,15.48 49.87,12.3 48.22,10.65 48.22,9.51 47.97,9.26 46.86,9.26 IC7.11
CTS7
  Top 0.305: J8.2 53.94,45.77 49.87,41.7 49.87,38.53 48.22,36.88 48.22,35.74 47.97,35.48 46.86,35.48 IC8.11
CTS8
  Top 0.305: J9.2 53.94,72 49.87,67.93 49.87,64.76 48.22,63.11 48.22,61.96 47.97,61.71 46.86,61.71 IC9.11
CTS9
  Top 0.305: J10.2 70.94,19.55 66.87,15.48 66.87,12.3 65.22,10.65 65.22,9.51 64.97,9.26 63.86,9.26 IC10.11
CTS10
  Top 0.305: J11.2 70.94,45.77 66.87,41.7 66.87,38.53 65.22,36.88 65.22,35.74 64.97,35.48 63.86,35.48 IC11.11
CTS11
  Top 0.305: J12.2 70.94,72 66.87,67.93 66.87,64.76 65.22,63.11 65.22,61.96 64.97,61.71 63.86,61.71 IC12.11
DTR
  Top 0.305: C4.1 11.56,18.02 11.68,17.89 11.68,15.35 11.92,15.12 IC1.2
DTR1
  Top 0.305: C8.1 11.56,44.24 11.68,44.12 11.68,41.58 11.92,41.34 IC2.2
DTR2
  Top 0.305: C12.1 11.56,70.47 11.68,70.34 11.68,67.81 11.92,67.57 IC3.2
DTR3
  Top 0.305: C16.1 28.56,18.02 28.68,17.89 28.68,15.35 28.92,15.12 IC4.2
DTR4
  Top 0.305: C20.1 28.56,44.24 28.68,44.12 28.68,41.58 28.92,41.34 IC5.2
DTR5
  Top 0.305: C24.1 28.56,70.47 28.68,70.34 28.68,67.81 28.92,67.57 IC6.2
DTR6
  Top 0.305: C28.1 45.56,18.02 45.68,17.89 45.68,15.35 45.92,15.12 IC7.2
DTR7
  Top 0.305: C32.1 45.56,44.24 45.68,44.12 45.68,41.58 45.92,41.34 IC8.2
DTR8
  Top 0.305: C36.1 45.56,70.47 45.68,70.34 45.68,67.81 45.92,67.57 IC9.2
DTR9
  Top 0.305: C40.1 62.56,18.02 62.68,17.89 62.68,15.35 62.92,15.12 IC10.2
DTR10
  Top 0.305: C44.1 62.56,44.24 62.68,44.12 62.68,41.58 62.92,41.34 IC11.2
DTR11
  Top 0.305: C48.1 62.56,70.47 62.68,70.34 62.68,67.81 62.92,67.57 IC12.2
GND  (via drill 0.51)
  Top 0.406: C1.2 11.7,11.87 IC1.7
  other vias: 11.43,10.91 20.19,5.34 18.41,9.13
  pour Bottom (isolate 0.254): 8,26.53 8,1 24.26,1 24.26,26.53
  pour Top (isolate 0.254): 8,26.53 8,1 24.26,1 24.26,26.53
GND1  (via drill 0.51)
  Top 0.406: C5.2 11.7,38.09 IC2.7
  other vias: 11.43,37.13 20.19,31.57 18.41,35.35
  pour Bottom (isolate 0.254): 8,52.75 8,27.23 24.26,27.23 24.26,52.75
  pour Top (isolate 0.254): 8,52.75 8,27.23 24.26,27.23 24.26,52.75
GND2  (via drill 0.51)
  Top 0.406: C9.2 11.7,64.32 IC3.7
  other vias: 11.43,63.36 20.19,57.8 18.41,61.58
  pour Bottom (isolate 0.254): 8,78.98 8,53.45 24.26,53.45 24.26,78.98
  pour Top (isolate 0.254): 8,78.98 8,53.45 24.26,53.45 24.26,78.98
GND3  (via drill 0.51)
  Top 0.406: C13.2 28.7,11.87 IC4.7
  other vias: 28.43,10.91 37.19,5.34 35.41,9.13
  pour Bottom (isolate 0.254): 25,26.53 25,1 41.26,1 41.26,26.53
  pour Top (isolate 0.254): 25,26.53 25,1 41.26,1 41.26,26.53
GND4  (via drill 0.51)
  Top 0.406: C17.2 28.7,38.09 IC5.7
  other vias: 28.43,37.13 37.19,31.57 35.41,35.35
  pour Bottom (isolate 0.254): 25,52.75 25,27.23 41.26,27.23 41.26,52.75
  pour Top (isolate 0.254): 25,52.75 25,27.23 41.26,27.23 41.26,52.75
GND5  (via drill 0.51)
  Top 0.406: C21.2 28.7,64.32 IC6.7
  other vias: 28.43,63.36 37.19,57.8 35.41,61.58
  pour Bottom (isolate 0.254): 25,78.98 25,53.45 41.26,53.45 41.26,78.98
  pour Top (isolate 0.254): 25,78.98 25,53.45 41.26,53.45 41.26,78.98
GND6  (via drill 0.51)
  Top 0.406: C25.2 45.7,11.87 IC7.7
  other vias: 45.43,10.91 54.19,5.34 52.41,9.13
  pour Bottom (isolate 0.254): 42,26.53 42,1 58.26,1 58.26,26.53
  pour Top (isolate 0.254): 42,26.53 42,1 58.26,1 58.26,26.53
GND7  (via drill 0.51)
  Top 0.406: C29.2 45.7,38.09 IC8.7
  other vias: 45.43,37.13 54.19,31.57 52.41,35.35
  pour Bottom (isolate 0.254): 42,52.75 42,27.23 58.26,27.23 58.26,52.75
  pour Top (isolate 0.254): 42,52.75 42,27.23 58.26,27.23 58.26,52.75
GND8  (via drill 0.51)
  Top 0.406: C33.2 45.7,64.32 IC9.7
  other vias: 45.43,63.36 54.19,57.8 52.41,61.58
  pour Bottom (isolate 0.254): 42,78.98 42,53.45 58.26,53.45 58.26,78.98
  pour Top (isolate 0.254): 42,78.98 42,53.45 58.26,53.45 58.26,78.98
GND9  (via drill 0.51)
  Top 0.406: C37.2 62.7,11.87 IC10.7
  other vias: 62.43,10.91 71.19,5.34 69.41,9.13
  pour Bottom (isolate 0.254): 59,26.53 59,1 75.26,1 75.26,26.53
  pour Top (isolate 0.254): 59,26.53 59,1 75.26,1 75.26,26.53
GND10  (via drill 0.51)
  Top 0.406: C41.2 62.7,38.09 IC11.7
  other vias: 62.43,37.13 71.19,31.57 69.41,35.35
  pour Bottom (isolate 0.254): 59,52.75 59,27.23 75.26,27.23 75.26,52.75
  pour Top (isolate 0.254): 59,52.75 59,27.23 75.26,27.23 75.26,52.75
GND11  (via drill 0.51)
  Top 0.406: C45.2 62.7,64.32 IC12.7
  other vias: 62.43,63.36 71.19,57.8 69.41,61.58
  pour Bottom (isolate 0.254): 59,78.98 59,53.45 75.26,53.45 75.26,78.98
  pour Top (isolate 0.254): 59,78.98 59,53.45 75.26,53.45 75.26,78.98
N$1  (via drill 0.51)
  Top 0.305: 23.48,14.46 TXLED.C 23.49,15.22 23.37,15.35 v22.35,15.35 | IC1.23 19.22,12.52 v18.29,13.45
  Bottom 0.305: v22.35,15.35 21.97,14.97 21.97,12.68 21.8,12.52 19.22,12.52 v18.29,13.45
N$2  (via drill 0.51)
  Top 0.305: v22.35,9.76 23.36,9.76 RXLED.C | IC1.22 18.47,11.87 v18.16,12.18
  Bottom 0.305: v22.35,9.76 21.97,10.14 21.97,11.67 21.77,11.87 18.47,11.87 v18.16,12.18
N$3
  Top 0.305: USB1.D- 15.48,7.21 16.24,7.97 IC1.16
N$4
  Top 0.305: USB1.D+ 16.13,7.1 16.38,7.35 20.13,7.35 IC1.15
N$5
  Top 0.406: ON.A 9.93,15.97 R2.2
N$6
  Top 0.406: RXLED.A TXLED.A 23.44,12.9 R1.1
N$7
  Top 0.305: C4.2 9.18,21.43 J1.6
N$8
  Top 0.305: USB2.D- 15.48,33.44 16.24,34.19 IC2.16
N$9
  Top 0.305: USB2.D+ 16.13,33.32 16.38,33.58 20.13,33.58 IC2.15
N$10
  Top 0.406: RXLED1.A TXLED1.A 23.44,39.13 R3.1
N$11
  Top 0.406: ON1.A 9.93,42.2 R4.2
N$12  (via drill 0.51)
  Top 0.305: TXLED1.C 23.49,41.45 23.37,41.58 v22.35,41.58 | IC2.23 19.22,38.74 v18.29,39.67
  Bottom 0.305: v22.35,41.58 21.97,41.2 21.97,38.91 21.8,38.74 19.22,38.74 v18.29,39.67
N$13  (via drill 0.51)
  Top 0.305: v22.35,35.99 23.36,35.99 RXLED1.C | IC2.22 18.47,38.09 v18.16,38.4
  Bottom 0.305: v22.35,35.99 21.97,36.37 21.97,37.9 21.77,38.09 18.47,38.09 v18.16,38.4
N$14
  Top 0.305: C8.2 9.18,47.66 J2.6
N$15
  Top 0.305: USB3.D- 15.48,59.66 16.24,60.42 IC3.16
N$16
  Top 0.305: USB3.D+ 16.13,59.55 16.38,59.8 20.13,59.8 IC3.15
N$17
  Top 0.406: RXLED2.A TXLED2.A 23.44,65.35 R5.1
N$18
  Top 0.406: ON2.A 9.93,68.43 R6.2
N$19  (via drill 0.51)
  Top 0.305: 23.48,66.92 TXLED2.C 23.49,67.68 23.37,67.81 v22.35,67.81 | IC3.23 19.22,64.97 v18.29,65.9
  Bottom 0.305: v22.35,67.81 21.97,67.42 21.97,65.14 21.8,64.97 19.22,64.97 v18.29,65.9
N$20  (via drill 0.51)
  Top 0.305: v22.35,62.22 23.36,62.22 RXLED2.C | IC3.22 18.47,64.32 v18.16,64.63
  Bottom 0.305: v22.35,62.22 21.97,62.6 21.97,64.12 21.77,64.32 18.47,64.32 v18.16,64.63
N$21
  Top 0.305: C12.2 9.18,73.89 J3.6
N$22
  Top 0.305: USB4.D- 32.48,7.21 33.24,7.97 IC4.16
N$23
  Top 0.305: USB4.D+ 33.13,7.1 33.38,7.35 37.13,7.35 IC4.15
N$24
  Top 0.406: RXLED3.A TXLED3.A 40.44,12.9 R7.1
N$25
  Top 0.406: ON3.A 26.93,15.97 R8.2
N$26  (via drill 0.51)
  Top 0.305: 40.48,14.46 TXLED3.C 40.49,15.22 40.37,15.35 v39.35,15.35 | IC4.23 36.22,12.52 v35.29,13.45
  Bottom 0.305: v39.35,15.35 38.97,14.97 38.97,12.68 38.8,12.52 36.22,12.52 v35.29,13.45
N$27  (via drill 0.51)
  Top 0.305: v39.35,9.76 40.35,9.76 RXLED3.C | IC4.22 35.47,11.87 v35.16,12.18
  Bottom 0.305: v39.35,9.76 38.97,10.14 38.97,11.67 38.77,11.87 35.47,11.87 v35.16,12.18
N$28
  Top 0.305: C16.2 26.18,21.43 J4.6
N$29
  Top 0.305: USB5.D- 32.48,33.44 33.24,34.19 IC5.16
N$30
  Top 0.305: USB5.D+ 33.13,33.32 33.38,33.58 37.13,33.58 IC5.15
N$31
  Top 0.406: RXLED4.A TXLED4.A 40.44,39.13 R9.1
N$32
  Top 0.406: ON4.A 26.93,42.2 R10.2
N$33  (via drill 0.51)
  Top 0.305: TXLED4.C 40.49,41.45 40.37,41.58 v39.35,41.58 | IC5.23 36.22,38.74 v35.29,39.67
  Bottom 0.305: v39.35,41.58 38.97,41.2 38.97,38.91 38.8,38.74 36.22,38.74 v35.29,39.67
N$34  (via drill 0.51)
  Top 0.305: v39.35,35.99 40.35,35.99 RXLED4.C | IC5.22 35.47,38.09 v35.16,38.4
  Bottom 0.305: v39.35,35.99 38.97,36.37 38.97,37.9 38.77,38.09 35.47,38.09 v35.16,38.4
N$35
  Top 0.305: C20.2 26.18,47.66 J5.6
N$36
  Top 0.305: USB6.D- 32.48,59.66 33.24,60.42 IC6.16
N$37
  Top 0.305: USB6.D+ 33.13,59.55 33.38,59.8 37.13,59.8 IC6.15
N$38
  Top 0.406: RXLED5.A TXLED5.A 40.44,65.35 R11.1
N$39
  Top 0.406: ON5.A 26.93,68.43 R12.2
N$40  (via drill 0.51)
  Top 0.305: 40.48,66.92 TXLED5.C 40.49,67.68 40.37,67.81 v39.35,67.81 | IC6.23 36.22,64.97 v35.29,65.9
  Bottom 0.305: v39.35,67.81 38.97,67.42 38.97,65.14 38.8,64.97 36.22,64.97 v35.29,65.9
N$41  (via drill 0.51)
  Top 0.305: v39.35,62.22 40.35,62.22 RXLED5.C | IC6.22 35.47,64.32 v35.16,64.63
  Bottom 0.305: v39.35,62.22 38.97,62.6 38.97,64.12 38.77,64.32 35.47,64.32 v35.16,64.63
N$42
  Top 0.305: C24.2 26.18,73.89 J6.6
N$43
  Top 0.305: USB7.D- 49.48,7.21 50.24,7.97 IC7.16
N$44
  Top 0.305: USB7.D+ 50.13,7.1 50.38,7.35 54.13,7.35 IC7.15
N$45
  Top 0.406: RXLED6.A TXLED6.A 57.44,12.9 R13.1
N$46
  Top 0.406: ON6.A 43.93,15.97 R14.2
N$47  (via drill 0.51)
  Top 0.305: 57.48,14.46 TXLED6.C 57.49,15.22 57.37,15.35 v56.35,15.35 | IC7.23 53.22,12.52 v52.29,13.45
  Bottom 0.305: v56.35,15.35 55.97,14.97 55.97,12.68 55.8,12.52 53.22,12.52 v52.29,13.45
N$48  (via drill 0.51)
  Top 0.305: v56.35,9.76 57.35,9.76 RXLED6.C | IC7.22 52.47,11.87 v52.16,12.18
  Bottom 0.305: v56.35,9.76 55.97,10.14 55.97,11.67 55.77,11.87 52.47,11.87 v52.16,12.18
N$49
  Top 0.305: C28.2 43.18,21.43 J7.6
N$50
  Top 0.305: USB8.D- 49.48,33.44 50.24,34.19 IC8.16
N$51
  Top 0.305: USB8.D+ 50.13,33.32 50.38,33.58 54.13,33.58 IC8.15
N$52
  Top 0.406: RXLED7.A TXLED7.A 57.44,39.13 R15.1
N$53
  Top 0.406: ON7.A 43.93,42.2 R16.2
N$54  (via drill 0.51)
  Top 0.305: TXLED7.C 57.49,41.45 57.37,41.58 v56.35,41.58 | IC8.23 53.22,38.74 v52.29,39.67
  Bottom 0.305: v56.35,41.58 55.97,41.2 55.97,38.91 55.8,38.74 53.22,38.74 v52.29,39.67
N$55  (via drill 0.51)
  Top 0.305: v56.35,35.99 57.35,35.99 RXLED7.C | IC8.22 52.47,38.09 v52.16,38.4
  Bottom 0.305: v56.35,35.99 55.97,36.37 55.97,37.9 55.77,38.09 52.47,38.09 v52.16,38.4
N$56
  Top 0.305: C32.2 43.18,47.66 J8.6
N$57
  Top 0.305: USB9.D- 49.48,59.66 50.24,60.42 IC9.16
N$58
  Top 0.305: USB9.D+ 50.13,59.55 50.38,59.8 54.13,59.8 IC9.15
N$59
  Top 0.406: RXLED8.A TXLED8.A 57.44,65.35 R17.1
N$60
  Top 0.406: ON8.A 43.93,68.43 R18.2
N$61  (via drill 0.51)
  Top 0.305: 57.48,66.92 TXLED8.C 57.49,67.68 57.37,67.81 v56.35,67.81 | IC9.23 53.22,64.97 v52.29,65.9
  Bottom 0.305: v56.35,67.81 55.97,67.42 55.97,65.14 55.8,64.97 53.22,64.97 v52.29,65.9
N$62  (via drill 0.51)
  Top 0.305: v56.35,62.22 57.35,62.22 RXLED8.C | IC9.22 52.47,64.32 v52.16,64.63
  Bottom 0.305: v56.35,62.22 55.97,62.6 55.97,64.12 55.77,64.32 52.47,64.32 v52.16,64.63
N$63
  Top 0.305: C36.2 43.18,73.89 J9.6
N$64
  Top 0.305: USB10.D- 66.48,7.21 67.24,7.97 IC10.16
N$65
  Top 0.305: USB10.D+ 67.13,7.1 67.38,7.35 71.13,7.35 IC10.15
N$66
  Top 0.406: RXLED9.A TXLED9.A 74.44,12.9 R19.1
N$67
  Top 0.406: ON9.A 60.93,15.97 R20.2
N$68  (via drill 0.51)
  Top 0.305: 74.48,14.46 TXLED9.C 74.49,15.22 74.37,15.35 v73.35,15.35 | IC10.23 70.22,12.52 v69.29,13.45
  Bottom 0.305: v73.35,15.35 72.97,14.97 72.97,12.68 72.8,12.52 70.22,12.52 v69.29,13.45
N$69  (via drill 0.51)
  Top 0.305: v73.35,9.76 74.36,9.76 RXLED9.C | IC10.22 69.47,11.87 v69.16,12.18
  Bottom 0.305: v73.35,9.76 72.97,10.14 72.97,11.67 72.77,11.87 69.47,11.87 v69.16,12.18
N$70
  Top 0.305: C40.2 60.18,21.43 J10.6
N$71
  Top 0.305: USB11.D- 66.48,33.44 67.24,34.19 IC11.16
N$72
  Top 0.305: USB11.D+ 67.13,33.32 67.38,33.58 71.13,33.58 IC11.15
N$73
  Top 0.406: RXLED10.A TXLED10.A 74.44,39.13 R21.1
N$74
  Top 0.406: ON10.A 60.93,42.2 R22.2
N$75  (via drill 0.51)
  Top 0.305: TXLED10.C 74.49,41.45 74.37,41.58 v73.35,41.58 | IC11.23 70.22,38.74 v69.29,39.67
  Bottom 0.305: v73.35,41.58 72.97,41.2 72.97,38.91 72.8,38.74 70.22,38.74 v69.29,39.67
N$76  (via drill 0.51)
  Top 0.305: v73.35,35.99 74.36,35.99 RXLED10.C | IC11.22 69.47,38.09 v69.16,38.4
  Bottom 0.305: v73.35,35.99 72.97,36.37 72.97,37.9 72.77,38.09 69.47,38.09 v69.16,38.4
N$77
  Top 0.305: C44.2 60.18,47.66 J11.6
N$78
  Top 0.305: USB12.D- 66.48,59.66 67.24,60.42 IC12.16
N$79
  Top 0.305: USB12.D+ 67.13,59.55 67.38,59.8 71.13,59.8 IC12.15
N$80
  Top 0.406: RXLED11.A TXLED11.A 74.44,65.35 R23.1
N$81
  Top 0.406: ON11.A 60.93,68.43 R24.2
N$82  (via drill 0.51)
  Top 0.305: 74.48,66.92 TXLED11.C 74.49,67.68 74.37,67.81 v73.35,67.81 | IC12.23 70.22,64.97 v69.29,65.9
  Bottom 0.305: v73.35,67.81 72.97,67.42 72.97,65.14 72.8,64.97 70.22,64.97 v69.29,65.9
N$83  (via drill 0.51)
  Top 0.305: v73.35,62.22 74.36,62.22 RXLED11.C | IC12.22 69.47,64.32 v69.16,64.63
  Bottom 0.305: v73.35,62.22 72.97,62.6 72.97,64.12 72.77,64.32 69.47,64.32 v69.16,64.63
N$84
  Top 0.305: C48.2 60.18,73.89 J12.6
PWR  (via drill 0.51)
  Top 0.406: JP1.2 JP1.3 | R2.1 10.76,15.01 11.95,13.82 IC1.4 13.83,13.82 v14.35,14.34 14.73,14.72 14.73,18.53 17.4,21.2 J1.3
  Bottom 0.406: JP1.2 13.91,7.42 14.35,7.86 v14.35,14.34
PWR1  (via drill 0.51)
  Top 0.406: JP2.2 JP2.3 | R4.1 10.76,41.24 11.95,40.04 IC2.4 13.83,40.04 v14.35,40.56 14.73,40.94 14.73,44.75 17.4,47.42 J2.3
  Bottom 0.406: JP2.2 13.91,33.64 14.35,34.09 v14.35,40.56
PWR2  (via drill 0.51)
  Top 0.406: JP3.2 JP3.3 | R6.1 10.76,67.46 11.95,66.27 IC3.4 13.83,66.27 v14.35,66.79 14.73,67.17 14.73,70.98 17.4,73.65 J3.3
  Bottom 0.406: JP3.2 13.91,59.87 14.35,60.31 v14.35,66.79
PWR3  (via drill 0.51)
  Top 0.406: JP4.2 JP4.3 | R8.1 27.75,15.01 28.95,13.82 IC4.4 30.83,13.82 v31.35,14.34 31.73,14.72 31.73,18.53 34.4,21.2 J4.3
  Bottom 0.406: JP4.2 30.91,7.42 31.35,7.86 v31.35,14.34
PWR4  (via drill 0.51)
  Top 0.406: JP5.2 JP5.3 | R10.1 27.75,41.24 28.95,40.04 IC5.4 30.83,40.04 v31.35,40.56 31.73,40.94 31.73,44.75 34.4,47.42 J5.3
  Bottom 0.406: JP5.2 30.91,33.64 31.35,34.09 v31.35,40.56
PWR5  (via drill 0.51)
  Top 0.406: JP6.2 JP6.3 | R12.1 27.75,67.46 28.95,66.27 IC6.4 30.83,66.27 v31.35,66.79 31.73,67.17 31.73,70.98 34.4,73.65 J6.3
  Bottom 0.406: JP6.2 30.91,59.87 31.35,60.31 v31.35,66.79
PWR6  (via drill 0.51)
  Top 0.406: JP7.2 JP7.3 | R14.1 44.76,15.01 45.95,13.82 IC7.4 47.83,13.82 v48.35,14.34 48.73,14.72 48.73,18.53 51.4,21.2 J7.3
  Bottom 0.406: JP7.2 47.91,7.42 48.35,7.86 v48.35,14.34
PWR7  (via drill 0.51)
  Top 0.406: JP8.2 JP8.3 | R16.1 44.76,41.24 45.95,40.04 IC8.4 47.83,40.04 v48.35,40.56 48.73,40.94 48.73,44.75 51.4,47.42 J8.3
  Bottom 0.406: JP8.2 47.91,33.64 48.35,34.09 v48.35,40.56
PWR8  (via drill 0.51)
  Top 0.406: JP9.2 JP9.3 | R18.1 44.76,67.46 45.95,66.27 IC9.4 47.83,66.27 v48.35,66.79 48.73,67.17 48.73,70.98 51.4,73.65 J9.3
  Bottom 0.406: JP9.2 47.91,59.87 48.35,60.31 v48.35,66.79
PWR9  (via drill 0.51)
  Top 0.406: JP10.2 JP10.3 | R20.1 61.76,15.01 62.95,13.82 IC10.4 64.83,13.82 v65.35,14.34 65.73,14.72 65.73,18.53 68.4,21.2 J10.3
  Bottom 0.406: JP10.2 64.91,7.42 65.35,7.86 v65.35,14.34
PWR10  (via drill 0.51)
  Top 0.406: JP11.2 JP11.3 | R22.1 61.76,41.24 62.95,40.04 IC11.4 64.83,40.04 v65.35,40.56 65.73,40.94 65.73,44.75 68.4,47.42 J11.3
  Bottom 0.406: JP11.2 64.91,33.64 65.35,34.09 v65.35,40.56
PWR11  (via drill 0.51)
  Top 0.406: JP12.2 JP12.3 | R24.1 61.76,67.46 62.95,66.27 IC12.4 64.83,66.27 v65.35,66.79 65.73,67.17 65.73,70.98 68.4,73.65 J12.3
  Bottom 0.406: JP12.2 64.91,59.87 65.35,60.31 v65.35,66.79
RXI  (via drill 0.51)
  Top 0.305: v15.87,17.64 15.37,17.13 15.37,13.83 14.71,13.17 IC1.5
  Bottom 0.305: v15.87,17.64 12.57,17.64 12.32,17.89 J1.5
RXI1  (via drill 0.51)
  Top 0.305: v15.87,43.86 15.37,43.36 15.37,40.05 14.71,39.39 IC2.5
  Bottom 0.305: v15.87,43.86 12.57,43.86 12.32,44.12 J2.5
RXI2  (via drill 0.51)
  Top 0.305: v15.87,70.09 15.37,69.58 15.37,66.28 14.71,65.62 IC3.5
  Bottom 0.305: v15.87,70.09 12.57,70.09 12.32,70.34 J3.5
RXI3  (via drill 0.51)
  Top 0.305: v32.87,17.64 32.37,17.13 32.37,13.83 31.7,13.17 IC4.5
  Bottom 0.305: v32.87,17.64 29.57,17.64 29.32,17.89 J4.5
RXI4  (via drill 0.51)
  Top 0.305: v32.87,43.86 32.37,43.36 32.37,40.05 31.7,39.39 IC5.5
  Bottom 0.305: v32.87,43.86 29.57,43.86 29.32,44.12 J5.5
RXI5  (via drill 0.51)
  Top 0.305: v32.87,70.09 32.37,69.58 32.37,66.28 31.7,65.62 IC6.5
  Bottom 0.305: v32.87,70.09 29.57,70.09 29.32,70.34 J6.5
RXI6  (via drill 0.51)
  Top 0.305: v49.87,17.64 49.37,17.13 49.37,13.83 48.7,13.17 IC7.5
  Bottom 0.305: v49.87,17.64 46.57,17.64 46.32,17.89 J7.5
RXI7  (via drill 0.51)
  Top 0.305: v49.87,43.86 49.37,43.36 49.37,40.05 48.7,39.39 IC8.5
  Bottom 0.305: v49.87,43.86 46.57,43.86 46.32,44.12 J8.5
RXI8  (via drill 0.51)
  Top 0.305: v49.87,70.09 49.37,69.58 49.37,66.28 48.7,65.62 IC9.5
  Bottom 0.305: v49.87,70.09 46.57,70.09 46.32,70.34 J9.5
RXI9  (via drill 0.51)
  Top 0.305: v66.87,17.64 66.37,17.13 66.37,13.83 65.7,13.17 IC10.5
  Bottom 0.305: v66.87,17.64 63.57,17.64 63.32,17.89 J10.5
RXI10  (via drill 0.51)
  Top 0.305: v66.87,43.86 66.37,43.36 66.37,40.05 65.7,39.39 IC11.5
  Bottom 0.305: v66.87,43.86 63.57,43.86 63.32,44.12 J11.5
RXI11  (via drill 0.51)
  Top 0.305: v66.87,70.09 66.37,69.58 66.37,66.28 65.7,65.62 IC12.5
  Bottom 0.305: v66.87,70.09 63.57,70.09 63.32,70.34 J12.5
TXO
  Top 0.305: J1.4 14.1,21.27 14.1,16.62 13.37,15.77 IC1.1
TXO1
  Top 0.305: J2.4 14.1,47.49 14.1,42.85 13.37,41.99 IC2.1
TXO2
  Top 0.305: J3.4 14.1,73.72 14.1,69.08 13.37,68.22 IC3.1
TXO3
  Top 0.305: J4.4 31.1,21.27 31.1,16.62 30.37,15.77 IC4.1
TXO4
  Top 0.305: J5.4 31.1,47.49 31.1,42.85 30.37,41.99 IC5.1
TXO5
  Top 0.305: J6.4 31.1,73.72 31.1,69.08 30.37,68.22 IC6.1
TXO6
  Top 0.305: J7.4 48.1,21.27 48.1,16.62 47.37,15.77 IC7.1
TXO7
  Top 0.305: J8.4 48.1,47.49 48.1,42.85 47.37,41.99 IC8.1
TXO8
  Top 0.305: J9.4 48.1,73.72 48.1,69.08 47.37,68.22 IC9.1
TXO9
  Top 0.305: J10.4 65.1,21.27 65.1,16.62 64.37,15.77 IC10.1
TXO10
  Top 0.305: J11.4 65.1,47.49 65.1,42.85 64.37,41.99 IC11.1
TXO11
  Top 0.305: J12.4 65.1,73.72 65.1,69.08 64.37,68.22 IC12.1

## Text on the board
tPlace: DTR | RXI | TXO | PWR | CTS | GND | DTR | RXI | TXO | PWR | CTS | GND | DTR | RXI | TXO | PWR | CTS | GND | DTR | RXI | TXO | PWR | CTS | GND | JUMPER SETS PWR TO 3V3/5V | JUMPER SETS PWR TO 3V3/5V | JUMPER SETS PWR TO 3V3/5V | JUMPER SETS PWR TO 3V3/5V | Ai FT232RL BREAKOUT | Ai FT232RL BREAKOUT | Ai FT232RL BREAKOUT | Ai FT232RL BREAKOUT | 5V | 5V | 5V | 5V | 3V3 | 3V3 | 3V3 | 3V3 | v1.3 | v1.3 | v1.3 | v1.3 | DTR | RXI | TXO | PWR | CTS | GND | DTR | RXI | TXO | PWR | CTS | GND | DTR | RXI | TXO | PWR | CTS | GND | DTR | RXI | TXO | PWR | CTS | GND | JUMPER SETS PWR TO 3V3/5V | JUMPER SETS PWR TO 3V3/5V | JUMPER SETS PWR TO 3V3/5V | JUMPER SETS PWR TO 3V3/5V | Ai FT232RL BREAKOUT | Ai FT232RL BREAKOUT | Ai FT232RL BREAKOUT | Ai FT232RL BREAKOUT | 5V | 5V | 5V | 5V | 3V3 | 3V3 | 3V3 | 3V3 | v1.3 | v1.3 | v1.3 | v1.3 | DTR | RXI | TXO | PWR | CTS | GND | DTR | RXI | TXO | PWR | CTS | GND | DTR | RXI | TXO | PWR | CTS | GND | DTR | RXI | TXO | PWR | CTS | GND | JUMPER SETS PWR TO 3V3/5V | JUMPER SETS PWR TO 3V3/5V | JUMPER SETS PWR TO 3V3/5V | JUMPER SETS PWR TO 3V3/5V | Ai FT232RL BREAKOUT | Ai FT232RL BREAKOUT | Ai FT232RL BREAKOUT | Ai FT232RL BREAKOUT | 5V | 5V | 5V | 5V | 3V3 | 3V3 | 3V3 | 3V3 | v1.3 | v1.3 | v1.3 | v1.3
bPlace: DTR | RXI | TXO | PWR | CTS | GND | DTR | RXI | TXO | PWR | CTS | GND | DTR | RXI | TXO | PWR | CTS | GND | DTR | RXI | TXO | PWR | CTS | GND | JUMPER SETS PWR TO 3V3/5V | JUMPER SETS PWR TO 3V3/5V | JUMPER SETS PWR TO 3V3/5V | JUMPER SETS PWR TO 3V3/5V | http://acrobotic.com | http://acrobotic.com | http://acrobotic.com | http://acrobotic.com | Ai FT232RL BREAKOUT | v1.3 | Ai FT232RL BREAKOUT | v1.3 | Ai FT232RL BREAKOUT | v1.3 | Ai FT232RL BREAKOUT | v1.3 | DTR | RXI | TXO | PWR | CTS | GND | DTR | RXI | TXO | PWR | CTS | GND | DTR | RXI | TXO | PWR | CTS | GND | DTR | RXI | TXO | PWR | CTS | GND | JUMPER SETS PWR TO 3V3/5V | JUMPER SETS PWR TO 3V3/5V | JUMPER SETS PWR TO 3V3/5V | JUMPER SETS PWR TO 3V3/5V | http://acrobotic.com | http://acrobotic.com | http://acrobotic.com | http://acrobotic.com | Ai FT232RL BREAKOUT | Ai FT232RL BREAKOUT | Ai FT232RL BREAKOUT | Ai FT232RL BREAKOUT | v1.3 | v1.3 | v1.3 | v1.3 | DTR | RXI | TXO | PWR | CTS | GND | DTR | RXI | TXO | PWR | CTS | GND | DTR | RXI | TXO | PWR | CTS | GND | DTR | RXI | TXO | PWR | CTS | GND | JUMPER SETS PWR TO 3V3/5V | JUMPER SETS PWR TO 3V3/5V | JUMPER SETS PWR TO 3V3/5V | JUMPER SETS PWR TO 3V3/5V | http://acrobotic.com | http://acrobotic.com | http://acrobotic.com | http://acrobotic.com | Ai FT232RL BREAKOUT | Ai FT232RL BREAKOUT | Ai FT232RL BREAKOUT | Ai FT232RL BREAKOUT | v1.3 | v1.3 | v1.3 | v1.3
_tsilk: Ai FT232RL BREAKOUT | v1.0 | DTR | RXI | R1 | TXLED | TXO | RXLED | R2 | PWR | R3 | CTS | 3V3 | PWR | PWR | 5V | GND | Jumper sets PWR to 3V3/5V | 5V | 3V3
_bsilk: C1 | C2 | /home/xisco/ai_logo.bmp | R4
_tNames: C4 | C4 | C4 | C4 | ON | C3 | ON | C3 | ON | C3 | ON | C3 | R2 | R2 | R2 | R2 | TXLED | TXLED | TXLED | TXLED | R1 | R1 | R1 | R1 | C1 | C1 | C1 | C1 | RXLED | RXLED | RXLED | RXLED | C2 | C2 | C2 | C2 | C4 | C4 | C4 | C4 | C3 | C3 | C3 | C3 | ON | ON | ON | ON | R2 | R2 | R2 | R2 | TXLED | TXLED | TXLED | TXLED | R1 | R1 | R1 | R1 | C1 | C1 | C1 | C1 | RXLED | RXLED | RXLED | RXLED | C2 | C2 | C2 | C2 | C4 | C4 | C4 | C4 | C3 | C3 | C3 | C3 | ON | ON | ON | ON | R2 | R2 | R2 | R2 | TXLED | TXLED | TXLED | TXLED | R1 | R1 | R1 | R1 | C1 | C1 | C1 | C1 | RXLED | RXLED | RXLED | RXLED | C2 | C2 | C2 | C2